# Altium PCB Pass_Filter.PcbDoc
Units mil, origin at the board's own origin, x right, y up, seen from the top; angles counter-clockwise.
Board outline 5976.38 x 3976.38 mil, 2 copper layers (Top Layer, Bottom Layer), stack 61.756 mil thick; 26 components, 10 nets, 62 pads, 0 vias.
Unrouted connection lines stored in the file: 42.
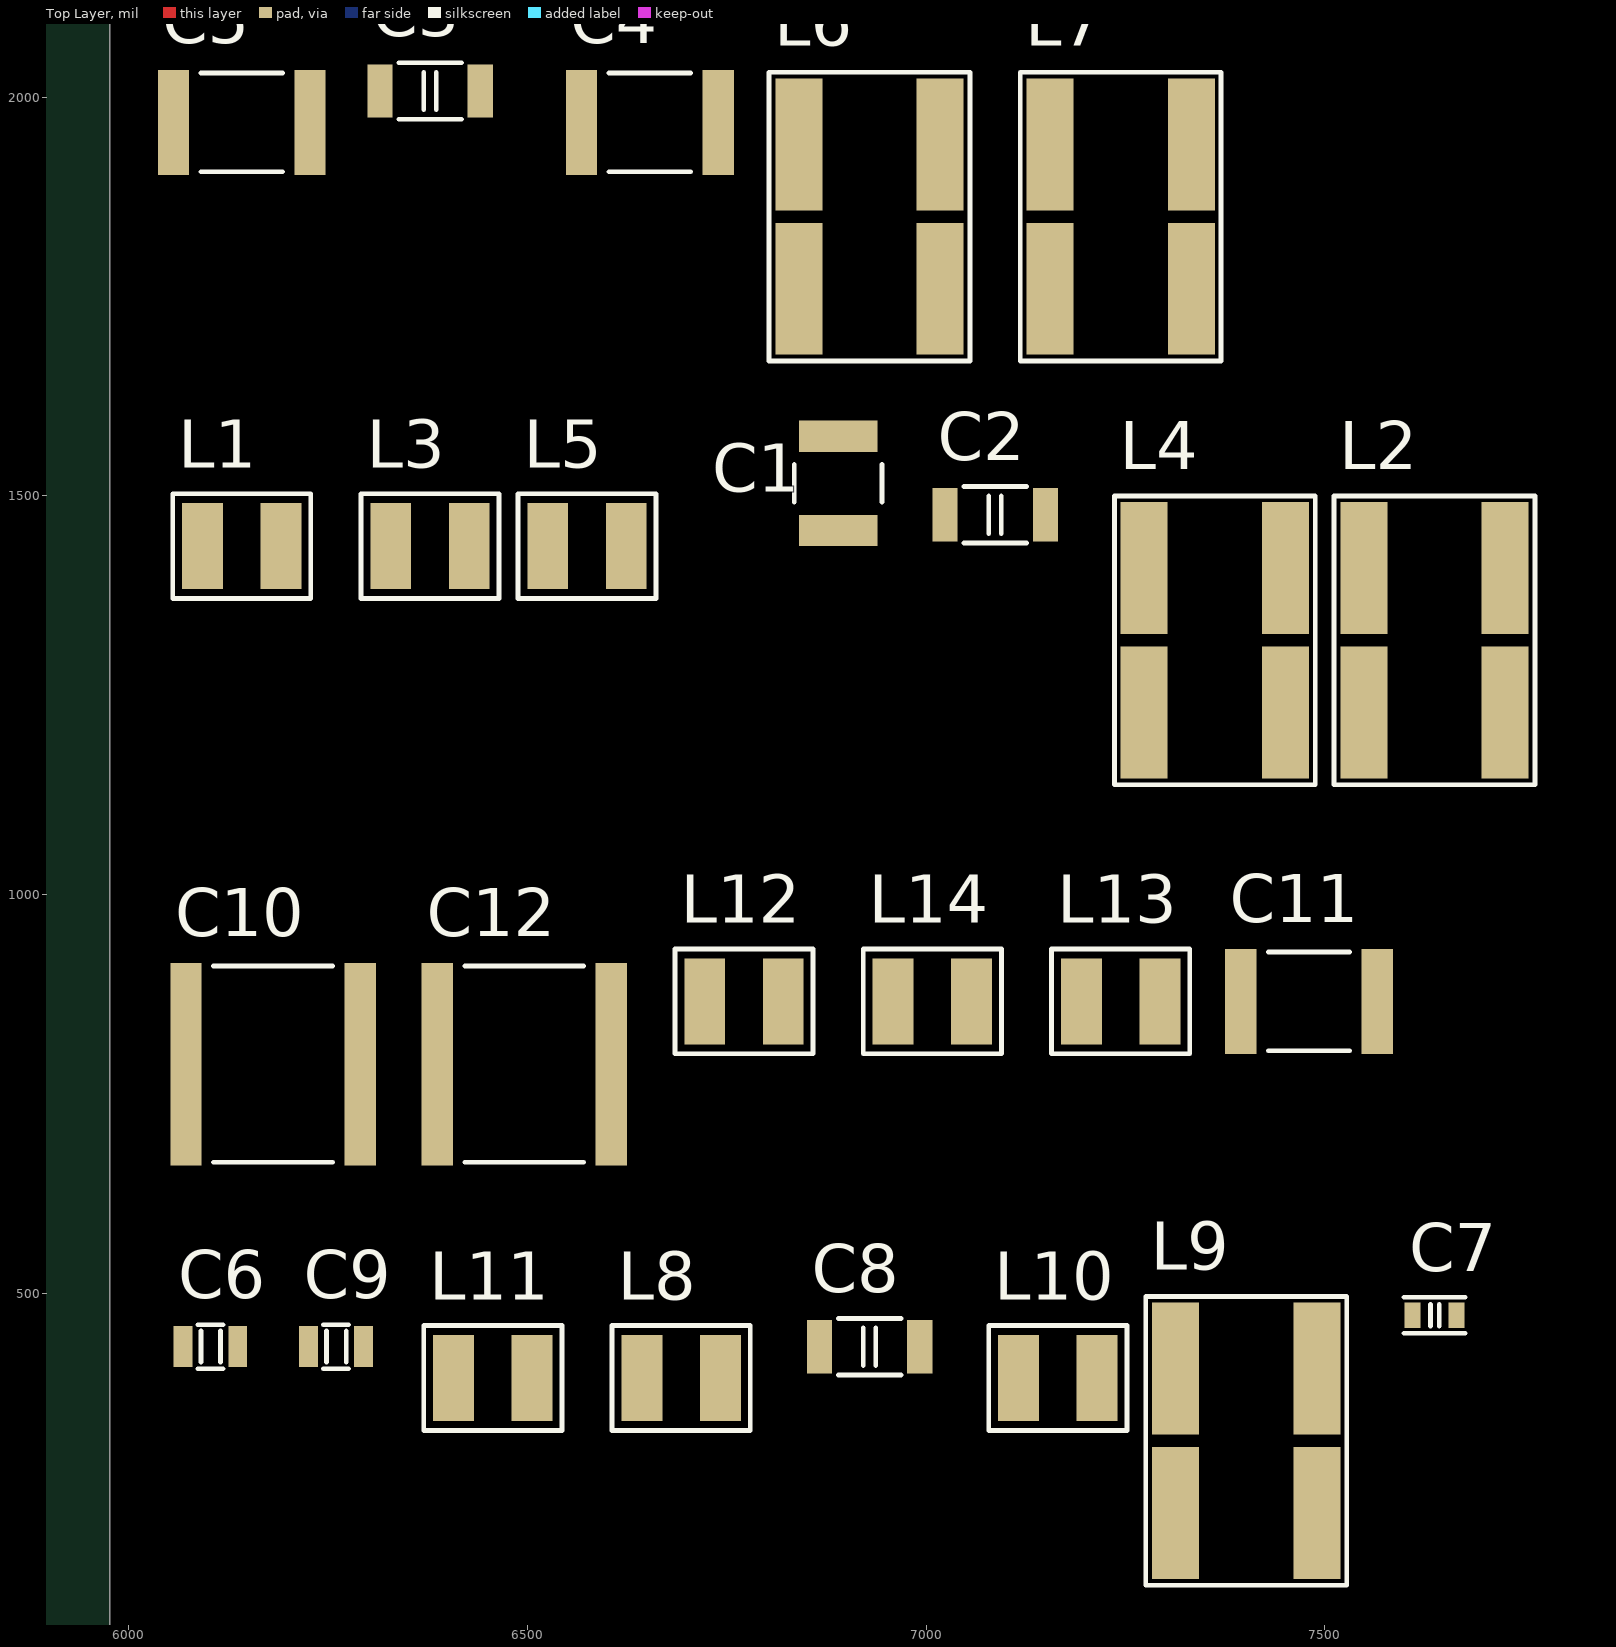
[diagram p0: Top Layer view]
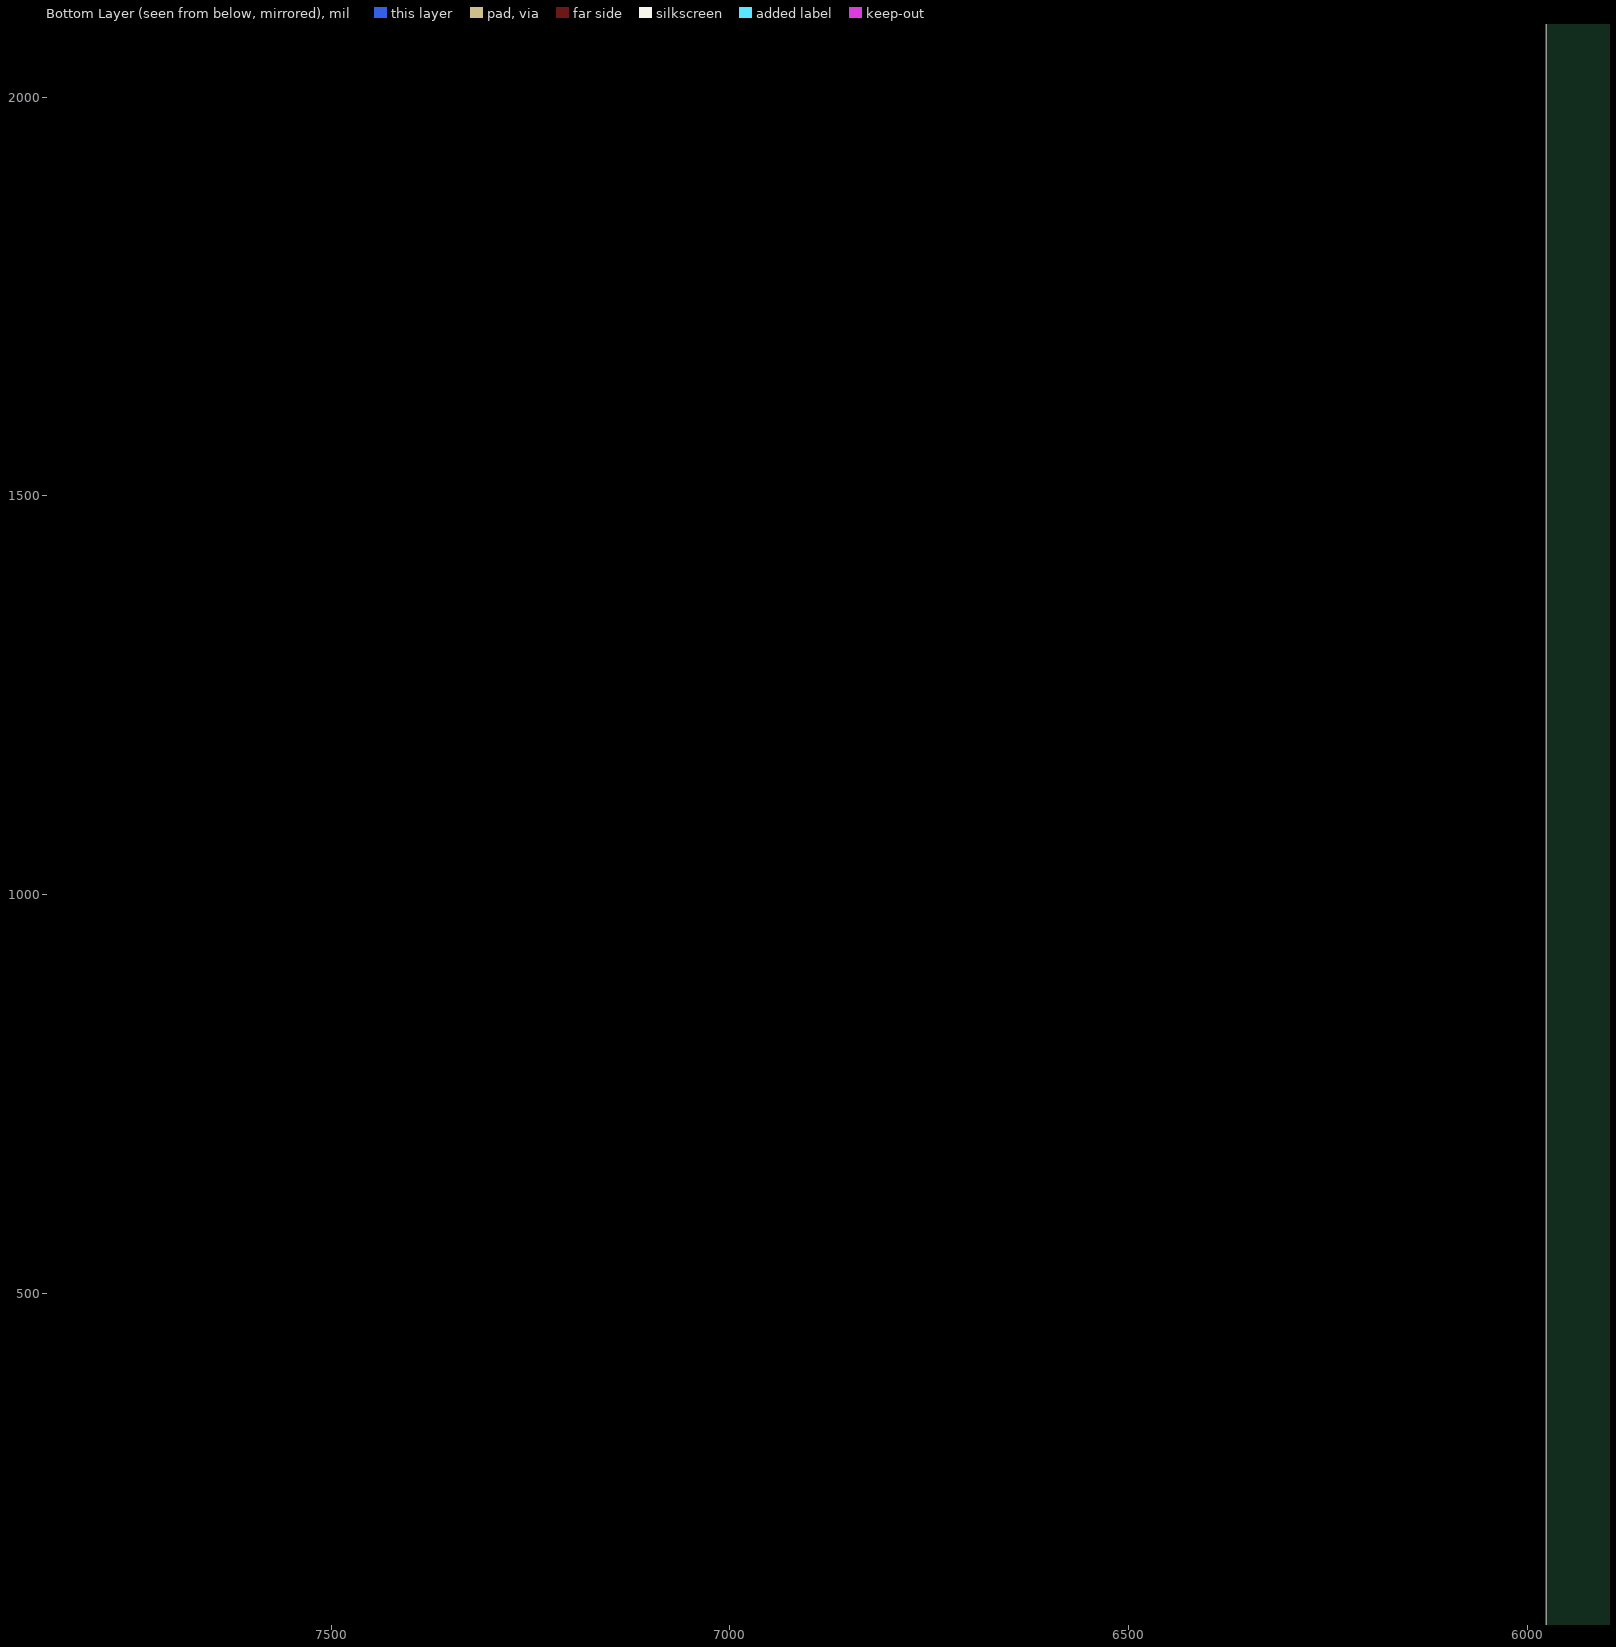
[diagram p1: Bottom Layer view, seen from below]

## Layer stack, top to bottom
Top Solder: solder mask 1, SM-001, Dk 4
Top Layer: signal copper 1.378
Dielectric 1: core 59, Core-043, Dk 4.3
Bottom Layer: signal copper 1.378
Bottom Solder: solder mask 1, SM-001, Dk 4

## Board outline
0,0 5976.38,0 5976.38,3976.38 0,3976.38

## Design rules (kind name [scope] priority, off if disabled: settings)
Clearance [All] p1: gap=10 ignorepadtopadclearanceinfootprint=FALSE except(0: Arc-Hole Track-Hole SMDPad-Hole THPad-Hole Via-Hole Fill-Hole Poly-Hole Region-Hole Text-Hole)
PolygonConnect [All] p1: connectstyle=Relief reliefconductorwidth=10 reliefentries=4 polygonreliefangle="90 Angle" airgapwidth=10
RoomDefinition low_pass_filter [InComponentClass('low_pass_filter')] p1: confinementstyle=ConfineIn formatcopy=TRUE lockcomponents=FALSE outline 6023.63,1653.54 7401.58,1653.54 7401.58,2165.36 6023.63,2165.36
RoomDefinition high_pass_filter [InComponentClass('high_pass_filter')] p2: confinementstyle=ConfineIn formatcopy=TRUE lockcomponents=FALSE outline 6023.62,1122.05 7795.28,1122.05 7795.28,1633.86 6023.62,1633.86
RoomDefinition band_pass_filter [InComponentClass('band_pass_filter')] p3: confinementstyle=ConfineIn formatcopy=TRUE lockcomponents=FALSE outline 6023.63,629.92 7598.43,629.92 7598.43,1062.99 6023.63,1062.99
RoomDefinition band-stop_filter [InComponentClass('band-stop_filter')] p4: confinementstyle=ConfineIn formatcopy=TRUE lockcomponents=FALSE outline 6023.63,118.11 7755.91,118.11 7755.91,629.92 6023.63,629.92
RoutingVias [All] p1: holewidth=28 width=50 viastyle="Through Hole" minholewidth=28 minwidth=50 maxholewidth=28 maxwidth=50
SolderMaskExpansion [All] p1: expansion=4 istentingtop=FALSE
Width [All] p1: maxlimit=10 minlimit=10 preferedwidth=10
30 further rules are at their usual default settings.

## Classes and differential pairs
component class high_pass_filter: C1 C2 L1 L2 L3 L4 L5
component class band_pass_filter: C10 C11 C12 L12 L13 L14
component class low_pass_filter: C3 C4 C5 L6 L7
component class band-stop_filter: C6 C7 C8 C9 L8 L9 L10 L11

## Components (designator, comment, footprint, x,y, rotation, side; value= is the part's Value field where it differs from the comment)
C1 "Cap" C1210 6889.76,1515.75 r90 top (schematic designator С1)
C2 "Cap" C1206 7086.61,1476.38 r0 top (schematic designator С2)
C3 "Cap" C1206 6377.96,2007.88 r0 top
C4 "Cap" C1812 6653.55,1968.51 r0 top
C5 "Cap" C1812 6141.74,1968.51 r0 top
C6 "Cap" C0805 6102.37,433.07 r0 top
C7 "Cap" C0603 7637.8,472.44 r0 top
C8 "Cap" C1206 6929.14,433.07 r0 top
C9 "Cap" C0805 6259.85,433.07 r0 top
C10 "Cap" C2225 6181.11,787.4 r0 top
C11 "Cap" C1812 7480.32,866.14 r0 top
C12 "Cap" C2225 6496.07,787.4 r0 top
L1 "L1008" L1008 6141.73,1437.01 r0 top
L2 "L1812" L1812 7637.8,1318.9 r0 top
L3 "L1008" L1008 6377.95,1437.01 r0 top
L4 "L1812" L1812 7362.2,1318.9 r0 top
L5 "L1008" L1008 6574.8,1437.01 r0 top
L6 "L1812" L1812 6929.14,1850.4 r0 top
L7 "L1812" L1812 7244.1,1850.4 r0 top
L8 "L1008" L1008 6692.92,393.7 r0 top
L9 "L1812" L1812 7401.58,314.96 r0 top
L10 "L1008" L1008 7165.36,393.7 r0 top
L11 "L1008" L1008 6456.7,393.7 r0 top
L12 "L1008" L1008 6771.66,866.14 r0 top
L13 "L1008" L1008 7244.1,866.14 r0 top
L14 "L1008" L1008 7007.88,866.14 r0 top

## Footprints (in the part's own frame and the unit in brackets; to place one, negate y for a bottom-side part, rotate by r counter-clockwise, add the part's x,y. Pads: shape width x height; smd on the part's side, far side on the other; paste and mask are expansions set on the pad)
C0603 [mm]
  rect 0.5x0.8 smd: 1(-0.7,0) 2(0.7,0)
  silkscreen extent -0.97,-0.58 0.97,0.58, body extent -0.8,-0.4 0.8,0.4, height 0.5
C0805 [mm]
  rect 0.6x1.3 smd: 1(-0.875,0) 2(0.875,0)
  silkscreen extent -0.4,-0.7 0.4,0.7, body extent -1,-0.6 1,0.6, height 0.8
C1206 [mm]
  rect 0.8x1.7 smd: 1(-1.6,0) 2(1.6,0)
  silkscreen extent -1,-0.9 1,0.9, body extent -1.7,-0.8 1.7,0.8, height 0.8
C1210 [mm]
  rect 1x2.5 smd: 1(1.5,0) 2(-1.5,0)
  silkscreen extent -0.6,-1.4 0.6,1.4, body extent -2,-1.3 2,1.3, height 1.6
C1812 [mm]
  rect 1x3.35 smd: 1(-2.175,0) 2(2.175,0)
  silkscreen extent -1.3,-1.58 1.3,1.58, body extent -2.25,-1.6 2.25,1.6, height 1
C2225 [mm]
  rect 1x6.45 smd: 1(-2.775,0) 2(2.775,0)
  silkscreen extent -1.9,-3.13 1.9,3.13, body extent -2.85,-3.15 2.85,3.15, height 2
L1008 [mm]
  rect 1.3x2.74 smd: 1(1.25,0) 2(-1.25,0)
  silkscreen extent -2.2,-1.67 2.2,1.67
L1812 [mm]
  rect 1.5x4.2 smd: 1(-2.25,-2.3) 2(-2.25,2.3) 3(2.25,-2.3) 4(2.25,2.3)
  silkscreen extent -3.2,-4.6 3.2,4.6

## Part data
L1 L3 L5 L8 L10 L11 L12 L13 L14: "Vishay IMC1008E2RJ7"
L2 L4 L6 L7 L9: "Vishay IMC1812ER150J"

## Nets (pads, with @x,y where several pads share a name; then routed paths per layer and width w, separated by ;. In a path a pad name is that pad's centre, name@x,y a point inside that pad or via, vN(x,y) a via of type N, cw(c..) or ccw(c..) an arc to the next point about the centre after c; other vN are vias at no path point)
GND: C3.2 C5.2 C6.2 C9.2 L1.1 L3.1 L5.1
NetC3_1: C3.1 C4.2 L6.1 L7.2
NetC4_1: C1.1 C4.1 C5.1 C8.1 C10.1 L1.2 L2.1 L7.1 L8.1 L9.1 L10.1 L12.2 L13.1
NetC6_1: C6.1 L8.2
NetC7_1: C7.1 L9.2
NetC7_2: C2.2 C7.2 C8.2 C11.2 C12.1 L4.2 L5.2 L6.2 L10.2 L11.1 L14.2
NetC9_1: C9.1 L11.2
NetC10_2: C10.2 C12.2 L12.1 L14.1
NetC11_1: C11.1 L13.2
NetL2_2: C1.2 C2.1 L2.2 L3.2 L4.1
pads on no net: L2.3 L2.4 L4.3 L4.4 L6.3 L6.4 L7.3 L7.4 L9.3 L9.4